# Altium PCB Digital Clock.PcbDoc (part 3 of 3)
Units mm, origin at the board's own origin, x right, y up, seen from the top; angles counter-clockwise.
Board outline 75 x 75 mm, 4 copper layers (Top Layer, GROUND, POWER, Bottom Layer), stack 1.369 mm thick; 74 components, 63 nets, 278 pads, 114 vias.
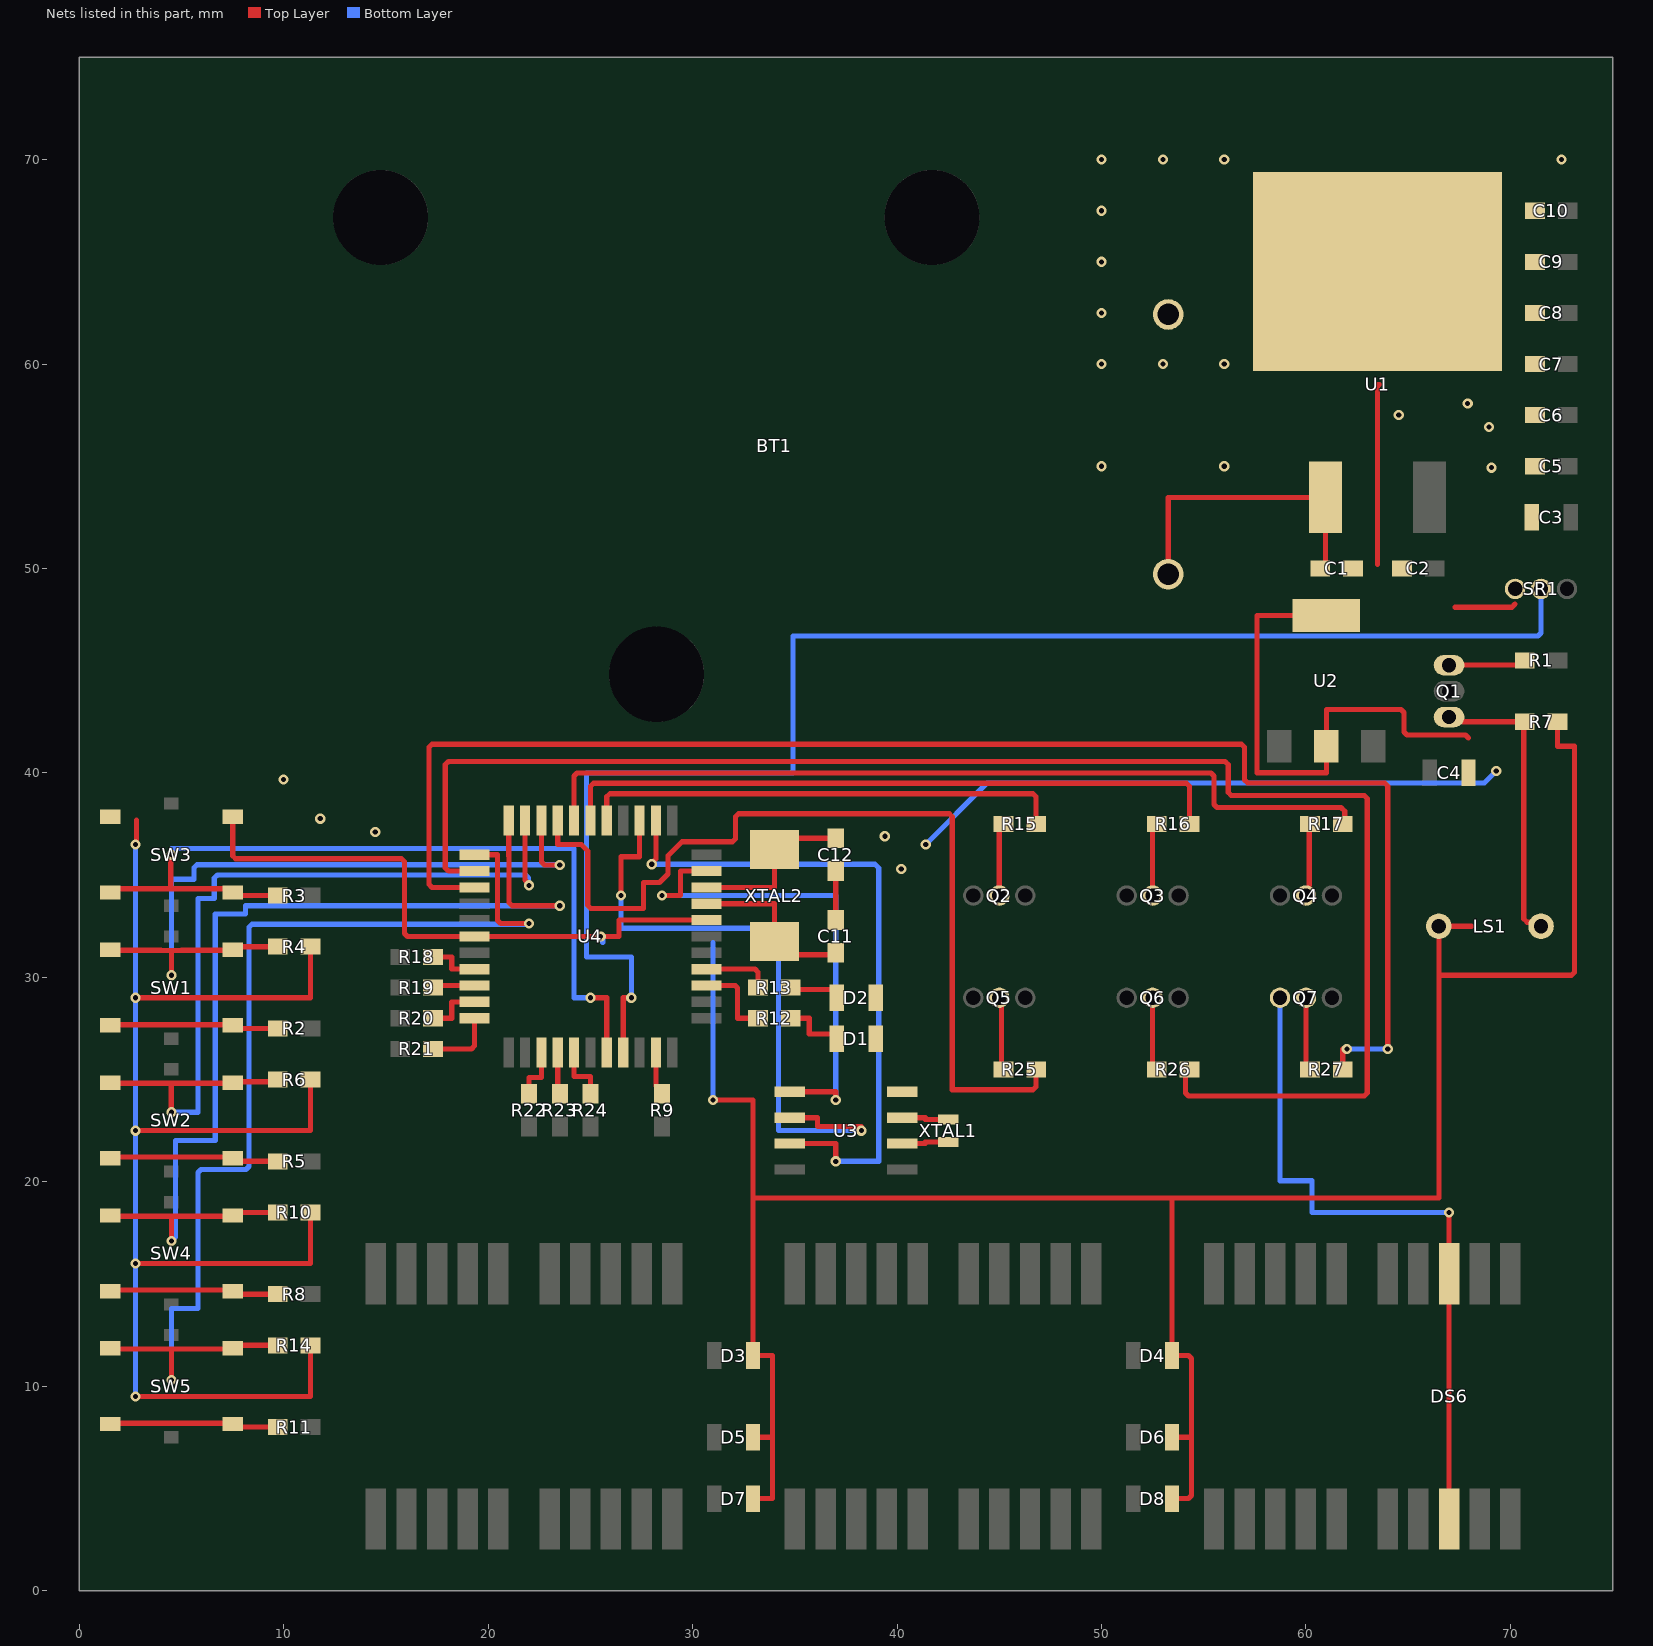
[diagram p4: the nets of this part, all layers, seen from the top]

## Via types
v1: diameter 0.5, hole 0.25, Top Layer to Bottom Layer, 110 vias
v2: diameter 1.5, hole 1, Top Layer to Bottom Layer, 4 vias

## Nets (pads, with @x,y where several pads share a name; then routed paths per layer and width w, separated by ;. In a path a pad name is that pad's centre, name@x,y a point inside that pad or via, vN(x,y) a via of type N, cw(c..) or ccw(c..) an arc to the next point about the centre after c; other vN are vias at no path point) (continued)
D5: DS6.VCC Q7.1 | length 33.8
  Top Layer w0.254: DS6.VCC@67,3.5 DS6.VCC@67,15.5 v1(67,18.5)
  Bottom Layer w0.254: Q7.1@58.73,29 58.73,20.049 60.3,20.049 60.3,18.5 v1(67,18.5)
DOWN: R14.1 SW5.1 U4.1 | length 55.3
  Top Layer w0.254: SW5.1@1.5,11.85 1.531,11.819 4.5,11.819 ; v1(4.5,10.3) 4.5,11.819 ; R14.1@9.7,12 7.65,12 SW5.1@7.5,11.85 7.47,11.82 5.009,11.82 5.008,11.819 4.5,11.819 ; U4.1@19.33,36 20.446,36 20.446,32.78 20.595,32.631 v1(22,32.631)
  Bottom Layer w0.254: v1(4.5,10.3) 4.5,13.8 5.8,13.8 5.8,20.451 5.949,20.6 8.151,20.6 8.3,20.749 8.3,32.451 8.449,32.6 21.969,32.6 v1(22,32.631)
GND: BT1.2 C1.1 C2.1 C3.1 C4.1 C5.1 C6.1 C7.1 C8.1 C9.1 C10.1 C11.1 C12.1 D1.2 D2.2 D3.2 D4.2 D5.2 D6.2 D7.2 D8.2 LS1.1 R4.2 R6.2 R7.1 R10.2 R14.2 SR1.3 SW3.1 U1.2 U2.2 U3.4 U4.6 U4.29 | length 289.8
  Top Layer w0.254: SW3.1@1.5,37.85 SW3.1@1.65,37.7 ; v1(2.75,9.5) 11.3,9.5 R14.2@11.3,12 ; v1(2.75,16) 11.3,16 R10.2@11.3,18.5 ; v1(2.75,22.5) 11.3,22.5 R6.2@11.3,25 ; v1(2.75,29) 11.3,29 R4.2@11.3,31.5 ; v1(2.75,36.5) 2.8,36.5 2.8,37.7 ; SW3.1@7.35,37.7 SW3.1@7.5,37.85 7.5,35.949 7.649,35.8 15.751,35.8 15.9,35.651 15.9,32.149 16.049,32 U4.6@19.33,32 v1(25.5,32) 26.4,32 26.4,32.8 U4.29@30.67,32.8 ; v1(31,24) 32.95,24 32.95,19.2 ; D7.2@32.95,4.5 33.9,4.5 33.9,7.5 ; D5.2@32.95,7.5 33.9,7.5 ; C11.1@37,32.8 C12.1@37,35.2 ; D8.2@53.45,4.5 54.251,4.5 54.4,4.649 54.4,7.5 ; D6.2@53.45,7.5 54.4,7.5 ; U2.2@61,47.7 57.6,47.7 57.6,40.008 61,40.008 U2.2@61,41.3 61,43.1 64.651,43.1 64.8,42.951 64.8,41.998 64.949,41.849 67.801,41.849 67.95,41.7 ; 63.5,50.2 63.5,59 63.6,59 ; 67.287,48.1 70.075,48.1 70.23,48.255 ; 68.1,32.5 LS1.1@66.5,32.5 66.5,30.1 ; R7.1@72.3,42.5 72.3,41.725 72.3,41.3 73.132,41.3 73.132,30.249 72.984,30.1 66.5,30.1 ; 32.95,19.2 53.45,19.2 ; 32.95,19.2 D3.2@32.95,11.5 33.9,11.5 33.9,7.5 ; 53.45,19.2 66.5,19.2 66.5,30.1 ; 53.45,19.2 D4.2@53.45,11.5 54.251,11.5 54.4,11.351 54.4,7.5
  Bottom Layer w0.254: v1(2.75,9.5) v1(2.75,16) v1(2.75,22.5) v1(2.75,29) v1(2.75,36.5) ; v1(25.5,32) 25.6,32 25.6,31.7 ; v1(31,24) 31,31.7 ; v1(41.4,36.5) 44.4,39.5 68.719,39.5 v1(69.31,40.091)
  other v1: 40.2,35.3 39.4,36.9 14.47,37.11 11.78,37.76 9.99,39.67 69.07,54.93 50,55 56,55 68.959,56.914 64.54,57.5 67.91,58.07 50,60 53,60 56,60 50,62.5 50,65 50,67.5 50,70 53,70 56,70 72.5,70
IO: U3.6 U4.36 | length 32
  Top Layer w0.254: v1(26.5,34) 26.5,35.9 27.4,35.9 U4.36@27.4,37.67 ; U3.6@34.75,23.135 36.1,23.135 36.1,22.7 38.25,22.7 v1(38.25,22.5)
  Bottom Layer w0.254: v1(26.5,34) 26.5,32.4 34.2,32.4 34.2,22.5 v1(38.25,22.5)
MODE: R6.1 SW2.1 U4.43 | length 42.4
  Top Layer w0.254: SW2.1@1.5,24.85 1.531,24.819 4.495,24.819 ; v1(4.5,23.4) 4.495,23.405 4.495,24.819 ; R6.1@9.7,25 9.59,24.89 7.54,24.89 7.47,24.82 5.009,24.82 5.008,24.819 4.495,24.819 ; U4.43@21.8,37.547 21.8,34.767 22,34.567 v1(22,34.5) ; U4.43@21.8,37.67 U4.43@21.923,37.547
  Bottom Layer w0.254: v1(4.5,23.4) 5.8,23.4 5.8,33.85 6.6,33.85 6.6,34.851 6.749,35 21.818,35 21.967,34.851 21.967,34.533 v1(22,34.5)
NetBT1_1: BT1.1 C1.2 U1.1 | length 15
  Top Layer w0.254: BT1.1@53.26,49.725 53.26,53.475 60.5,53.475 60.87,53.475 U1.1@60.96,53.475 60.96,50.26 C1.2@60.7,50
NetC11_2: C11.2 U4.30 XTAL2.2 | length 8.5
  Top Layer w0.254: U4.30@30.67,33.6 34,33.6 XTAL2.2@34,31.75 34.65,31.1 36.9,31.1 C11.2@37,31.2
NetC12_2: C12.2 U4.31 XTAL2.1 | length 8.4
  Top Layer w0.254: U4.31@30.67,34.4 34,34.4 XTAL2.1@34,36.25 34.55,36.8 C12.2@37,36.8
NetD1_1: D1.1 R12.2 | length 3.1
  Top Layer w0.254: R12.2@34.8,28 35.7,28 35.7,27.226 36.827,27.226 37.05,27.002 D1.1@37.05,27
NetD2_1: D2.1 R13.2 | length 2.6
  Top Layer w0.254: R13.2@34.8,29.5 34.9,29.4 36.827,29.4 37.05,29.177 D2.1@37.05,29
NetLS1_2: LS1.2 Q1.3 R7.2 | length 14.5
  Top Layer w0.254: Q1.3@67,42.73 67.452,42.73 67.682,42.5 R7.2@70.7,42.5 70.651,42.451 70.651,32.864 70.824,32.691 71.309,32.691 LS1.2@71.5,32.5
NetQ1_1: Q1.1 R1.1 | length 3.8
  Top Layer w0.254: Q1.1@67,45.27 67.01,45.28 70.48,45.28 R1.1@70.7,45.5
NetQ2_2: Q2.2 R15.2 | length 3.6
  Top Layer w0.203: R15.2@45,37.3 R15.2@45.2,37.5
  Top Layer w0.254: Q2.2@45,34 R15.2@45,37.3
NetQ3_2: Q3.2 R16.2 | length 3.6
  Top Layer w0.203: R16.2@52.5,37.3 R16.2@52.7,37.5
  Top Layer w0.254: Q3.2@52.5,34 R16.2@52.5,37.3
NetQ4_2: Q4.2 R17.2 | length 3.6
  Top Layer w0.254: Q4.2@60,34 60.143,34.143 60.143,34.505 60.16,34.522 60.16,37.46 R17.2@60.2,37.5
NetQ5_2: Q5.2 R25.2 | length 3.6
  Top Layer w0.203: Q5.2@45,29 Q5.2@45.1,28.9 ; R25.2@45.1,25.6 R25.2@45.2,25.5
  Top Layer w0.254: R25.2@45.1,25.6 Q5.2@45.1,28.9
NetQ6_2: Q6.2 R26.2 | length 3.6
  Top Layer w0.203: R26.2@52.5,25.7 R26.2@52.7,25.5
  Top Layer w0.254: R26.2@52.5,25.7 Q6.2@52.5,29
NetQ7_2: Q7.2 R27.2 | length 3.6
  Top Layer w0.203: R27.2@60,25.7 R27.2@60.2,25.5
  Top Layer w0.254: R27.2@60,25.7 Q7.2@60,29
NetR2_1: R2.1 SW1.2 | length 8.3
  Top Layer w0.254: SW1.2@1.5,27.65 1.531,27.681 7.469,27.681 7.65,27.5 R2.1@9.7,27.5
NetR3_1: R3.1 SW3.2 U4.18 | length 41.7
  Top Layer w0.254: SW3.2@1.5,34.15 1.68,34.33 4.47,34.33 ; v1(4.5,36) 4.47,35.97 4.47,34.33 ; SW3.2@7.449,34.201 7.65,34 R3.1@9.7,34 ; SW3.2@7.5,34.15 7.32,34.33 4.47,34.33 ; v1(25,29) 25.8,29 U4.18@25.8,26.33
  Bottom Layer w0.254: v1(4.5,36) 4.5,36.3 24.2,36.3 24.2,29 v1(25,29)
NetR5_1: R5.1 SW2.2 | length 8.4
  Top Layer w0.254: SW2.2@1.5,21.15 1.56,21.21 7.44,21.21 SW2.2@7.5,21.15 ; SW2.2@7.469,21.181 7.65,21 R5.1@9.7,21
NetR8_1: R8.1 SW4.2 | length 8.4
  Top Layer w0.254: SW4.2@1.5,14.65 1.56,14.71 7.44,14.71 SW4.2@7.5,14.65 ; SW4.2@7.469,14.681 7.65,14.5 R8.1@9.7,14.5
NetR9_1: R9.1 U4.21 | length 2.2
  Top Layer w0.254: U4.21@28.2,26.33 28.2,24.689 28.5,24.389 R9.1@28.5,24.3
NetR11_1: R11.1 SW5.2 | length 8.4
  Top Layer w0.203: SW5.2@7.45,8.2 SW5.2@7.65,8
  Top Layer w0.254: SW5.2@1.5,8.15 1.54,8.19 7.46,8.19 SW5.2@7.5,8.15 ; SW5.2@7.65,8 R11.1@9.7,8
NetR12_1: R12.1 U4.25 | length 4.1
  Top Layer w0.254: U4.25@30.67,29.6 32.081,29.6 32.2,29.481 32.2,28 R12.1@33.2,28
NetR13_1: R13.1 U4.26 | length 3.3
  Top Layer w0.254: U4.26@30.67,30.4 33.051,30.4 33.2,30.251 R13.1@33.2,29.5
NetSR1_2: SR1.2 U4.19 | length 71.9
  Top Layer w0.254: U4.19@26.6,26.33 26.6,29 v1(27,29)
  Bottom Layer w0.254: v1(27,29) 27,31 24.8,31 24.8,40 34.9,40 34.9,46.7 71.351,46.7 71.5,46.849 SR1.2@71.5,49
NetU3_2: U3.2 XTAL1.1 | length 2.3
  Top Layer w0.254: U3.2@40.25,21.865 41.381,21.865 41.381,21.95 XTAL1.1@42.5,21.95
NetU3_3: U3.3 XTAL1.2 | length 2.3
  Top Layer w0.254: U3.3@40.25,23.135 41.381,23.135 41.381,23.05 XTAL1.2@42.5,23.05
RB0: R18.1 U4.8 | length 2.6
  Top Layer w0.254: R18.1@17.3,31 18.214,31 18.214,30.4 U4.8@19.33,30.4
RB1: R19.1 U4.9 | length 2.1
  Top Layer w0.254: R19.1@17.3,29.5 17.4,29.6 U4.9@19.33,29.6
RB2: R20.1 U4.10 | length 2.8
  Top Layer w0.254: R20.1@17.3,28 18.214,28 18.214,28.8 U4.10@19.33,28.8
RB3: R21.1 U4.11 | length 3.4
  Top Layer w0.254: R21.1@17.3,26.5 19.181,26.5 19.33,26.649 U4.11@19.33,28
RB4: R22.1 U4.14 | length 2.6
  Top Layer w0.254: R22.1@22,24.3 22,25.1 22.6,25.1 U4.14@22.6,26.33
RB5: R23.1 U4.15 | length 2.1
  Top Layer w0.254: U4.15@23.4,26.33 23.4,24.4 R23.1@23.5,24.3
RB6: R24.1 U4.16 | length 2.8
  Top Layer w0.254: U4.16@24.2,26.33 24.2,25.145 25,25.145 R24.1@25,24.3
RD0: R15.1 U4.38 | length 23.6
  Top Layer w0.254: U4.38@25.8,37.67 25.8,38.835 25.949,38.984 46.651,38.984 46.8,38.835 R15.1@46.8,37.5
RD1: R16.1 U4.39 | length 32.9
  Top Layer w0.254: U4.39@25,37.67 25,39.343 25.149,39.492 54.151,39.492 54.3,39.343 R16.1@54.3,37.5
RD2: R17.1 U4.40 | length 42.2
  Top Layer w0.254: U4.40@24.2,37.67 24.2,39.851 24.349,40 55.351,40 55.5,39.851 55.5,38.449 55.649,38.3 61.72,38.3 61.894,38.126 61.894,37.594 R17.1@61.8,37.5
RD3: R25.1 U4.41 | length 45.6
  Top Layer w0.254: U4.41@23.4,37.67 23.4,36.5 24.551,36.5 24.869,36.182 24.869,33.518 25.018,33.369 27.6,33.369 27.6,34.631 28.382,34.631 28.8,35.049 28.8,35.946 29.485,36.631 31.951,36.631 32.1,36.78 32.1,37.851 32.249,38 42.551,38 42.7,37.851 42.7,24.5 46.651,24.5 46.8,24.649 R25.1@46.8,25.5
RD4: R26.1 U4.2 | length 77.9
  Top Layer w0.254: U4.2@19.33,35.2 18.049,35.2 17.9,35.349 17.9,40.403 18.049,40.552 56.043,40.552 56.2,40.395 56.2,39.049 56.349,38.9 62.851,38.9 63,38.751 63,24.349 62.851,24.2 54.249,24.2 54.1,24.349 54.1,25.3 R26.1@54.3,25.5
RD5: R27.1 U4.3 | length 73.8
  Top Layer w0.254: U4.3@19.33,34.4 17.249,34.4 17.1,34.549 17.1,41.251 17.249,41.4 56.851,41.4 57,41.251 57,39.649 57.149,39.5 63.851,39.5 64,39.351 v1(64,26.5) ; R27.1@61.8,25.5 61.8,26.5 v1(62,26.5)
  Bottom Layer w0.254: v1(62,26.5) v1(64,26.5)
RST: U3.5 U4.32 | length 24.5
  Top Layer w0.254: v1(28.5,34) 29.4,34 29.4,35.2 U4.32@30.67,35.2 ; U3.5@34.75,24.405 37,24.405 v1(37,24)
  Bottom Layer w0.254: v1(28.5,34) 37,34 v1(37,24)
SCLK: U3.7 U4.35 | length 33
  Top Layer w0.254: v1(28,35.531) 28,35.598 28.2,35.798 U4.35@28.2,37.67 ; U3.7@34.75,21.865 37,21.865 v1(37,21)
  Bottom Layer w0.254: v1(28,35.531) 38.92,35.531 39.1,35.351 39.1,21 v1(37,21)
SET: R4.1 SW1.1 U4.42 | length 36.8
  Top Layer w0.254: SW1.1@1.5,31.35 1.53,31.32 3.991,31.32 ; v1(4.5,30.1) 4.5,31.319 ; R4.1@9.7,31.5 7.65,31.5 7.47,31.32 5.009,31.32 5.008,31.319 4.5,31.319 ; U4.42@22.6,37.67 22.6,35.649 22.749,35.5 v1(23.5,35.5) ; 3.992,31.319 4.5,31.319 ; 3.991,31.32 3.992,31.319
  Bottom Layer w0.254: v1(4.5,30.1) 4.5,34.8 5.6,34.8 5.6,35.359 5.749,35.508 23.492,35.508 v1(23.5,35.5)
UP: R10.1 SW4.1 U4.44 | length 51.4
  Top Layer w0.254: SW4.1@1.5,18.35 1.54,18.31 7.46,18.31 SW4.1@7.5,18.35 ; v1(4.5,17.1) 4.5,18.319 ; SW4.1@7.469,18.319 7.65,18.5 R10.1@9.7,18.5 ; U4.44@21,37.67 21,35.951 21.008,35.943 21.008,33.649 21.157,33.5 v1(23.5,33.5)
  Bottom Layer w0.254: v1(4.5,17.1) 4.7,17.3 4.7,22.02 6.65,22.02 6.65,33.1 8.13,33.1 8.13,33.5 v1(23.5,33.5)
pads on no net: BT1. DS1.DP DS2.DP DS3.DP DS4.DP DS5.DP DS6.DP SW1.G SW2.G SW3.G SW4.G SW5.G U4.4 U4.5 U4.12 U4.13 U4.17 U4.22 U4.23 U4.24 U4.27 U4.33 U4.34
copper on no net: | length 347.8
  Top Layer w0.018: 5.487,4.096 7.846,4.096 ; 5.487,4.114 7.846,4.114 ; 5.487,4.132 7.828,4.132 ; 5.487,4.15 7.828,4.15 ; 5.487,4.168 7.828,4.168 ; 5.487,4.186 7.81,4.186 ; 5.487,4.204 7.81,4.204 ; 5.487,4.223 7.792,4.223 ; 5.487,4.241 7.792,4.241 ; 5.487,4.259 7.792,4.259 ; 5.487,4.277 7.774,4.277 ; 5.487,4.295 7.774,4.295 ; 5.487,4.313 7.756,4.313 ; 5.487,4.331 7.756,4.331 ; 5.487,4.35 7.756,4.35 ; 5.487,4.368 7.737,4.368 ; 5.487,4.386 7.737,4.386 ; 5.487,4.404 7.719,4.404 ; 5.487,4.422 7.719,4.422 ; 5.487,4.44 7.701,4.44 ; 5.487,4.459 7.701,4.459 ; 5.505,3.86 7.901,3.86 ; 5.505,3.878 7.901,3.878 ; 5.505,3.896 7.901,3.896 ; 5.505,3.914 7.901,3.914 ; 5.505,3.932 7.901,3.932 ; 5.505,3.95 7.883,3.95 ; 5.505,3.969 7.883,3.969 ; 5.505,3.987 7.883,3.987 ; 5.505,4.005 7.883,4.005 ; 5.505,4.023 7.864,4.023 ; 5.505,4.041 7.864,4.041 ; 5.505,4.059 7.864,4.059 ; 5.505,4.077 7.846,4.077 ; 5.505,4.477 7.683,4.477 ; 5.505,4.495 7.683,4.495 ; 5.505,4.513 7.665,4.513 ; 5.505,4.531 7.665,4.531 ; 5.505,4.549 7.647,4.549 ; 5.505,4.567 7.647,4.567 ; 5.523,3.733 7.937,3.733 ; 5.523,3.751 7.937,3.751 ; 5.523,3.769 7.937,3.769 ; 5.523,3.787 7.919,3.787 ; 5.523,3.805 7.919,3.805 ; 5.523,3.823 7.919,3.823 ; 5.523,3.841 7.919,3.841 ; 5.523,4.586 7.629,4.586 ; 5.523,4.604 7.61,4.604 ; 5.523,4.622 7.61,4.622 ; 5.523,4.64 7.592,4.64 ; 5.523,5.221 5.723,5.221 ; 5.523,5.239 5.723,5.239 ; 5.523,5.257 5.723,5.257 ; 5.523,5.275 5.705,5.275 ; 5.523,5.293 5.705,5.293 ; 5.523,5.311 5.705,5.311 ; 5.523,5.33 5.705,5.33 ; 5.523,5.348 5.705,5.348 ; 5.523,5.366 5.705,5.366 ; 5.523,5.384 5.705,5.384 ; 5.542,3.66 7.955,3.66 ; 5.542,3.678 7.955,3.678 ; 5.542,3.696 7.937,3.696 ; 5.542,3.714 7.937,3.714 ; 5.542,4.658 7.592,4.658 ; 5.542,4.676 7.574,4.676 ; 5.542,4.694 7.556,4.694 ; 5.542,4.713 7.556,4.713 ; 5.542,5.094 5.777,5.094 ; 5.542,5.112 5.777,5.112 ; 5.542,5.13 5.759,5.13 ; 5.542,5.148 5.759,5.148 ; 5.542,5.166 5.741,5.166 ; 5.542,5.184 5.741,5.184 ; 5.542,5.203 5.723,5.203 ; 5.542,5.402 5.705,5.402 ; 5.542,5.42 5.705,5.42 ; 5.542,5.439 5.705,5.439 ; 5.542,5.457 5.705,5.457 ; 5.542,5.475 5.705,5.475 ; 5.542,5.493 5.723,5.493 ; 5.542,5.511 5.723,5.511 ; 5.56,3.624 7.955,3.624 ; 5.56,3.642 7.955,3.642 ; 5.56,4.731 7.538,4.731 ; 5.56,4.749 7.52,4.749 ; 5.56,4.767 6.376,4.767 ; 5.56,5.021 5.832,5.021 ; 5.56,5.039 5.814,5.039 ; 5.56,5.057 5.814,5.057 ; 5.56,5.076 5.796,5.076 ; 5.56,5.529 5.723,5.529 ; 5.56,5.547 5.723,5.547 ; 5.56,5.566 5.723,5.566 ; 5.56,5.584 5.723,5.584 ; 5.578,3.569 7.955,3.569 ; 5.578,3.587 7.955,3.587 ; 5.578,3.606 7.955,3.606 ; 5.578,4.785 6.286,4.785 ; 5.578,4.803 6.213,4.803 ; 5.578,4.821 6.159,4.821 ; 5.578,4.967 5.886,4.967 ; 5.578,4.985 5.868,4.985 ; 5.578,5.003 5.85,5.003 ; 5.578,5.602 5.741,5.602 ; 5.578,5.62 5.741,5.62 ; 5.578,5.638 5.741,5.638 ; 5.596,3.533 7.955,3.533 ; 5.596,3.551 7.955,3.551 ; 5.596,4.84 6.104,4.84 ; 5.596,4.858 6.068,4.858 ; 5.596,4.876 6.032,4.876 ; 5.596,4.93 5.941,4.93 ; 5.596,4.949 5.904,4.949 ; 5.596,5.656 5.741,5.656 ; 5.596,5.674 5.759,5.674 ; 5.614,3.515 7.955,3.515 ; 5.614,4.894 5.995,4.894 ; 5.614,4.912 5.959,4.912 ; 5.614,5.693 5.759,5.693 ; 5.614,5.711 5.777,5.711 ; 5.614,5.729 5.777,5.729 ; 5.632,3.479 7.955,3.479 ; 5.632,3.497 7.955,3.497 ; 5.632,5.747 5.796,5.747 ; 5.632,5.765 5.796,5.765 ; 5.65,3.46 7.955,3.46 ; 5.65,5.783 5.814,5.783 ; 5.65,5.801 5.832,5.801 ; 5.669,3.442 7.955,3.442 ; 5.669,5.82 5.85,5.82 ; 5.687,3.406 7.955,3.406 ; 5.687,3.424 7.955,3.424 ; 5.687,5.838 5.85,5.838 ; 5.687,5.856 5.868,5.856 ; 5.687,6.364 5.85,6.364 ; 5.687,6.382 5.814,6.382 ; 5.687,6.4 5.777,6.4 ; 5.705,3.388 7.955,3.388 ; 5.705,5.874 5.886,5.874 ; 5.705,6.291 6.032,6.291 ; 5.705,6.31 5.977,6.31 ; 5.705,6.328 5.923,6.328 ; 5.705,6.346 5.886,6.346 ; 5.723,3.37 7.955,3.37 ; 5.723,5.892 5.923,5.892 ; 5.723,5.91 5.941,5.91 ; 5.723,6.255 6.159,6.255 ; 5.723,6.273 6.086,6.273 ; 5.741,3.351 7.955,3.351 ; 5.741,5.928 5.959,5.928 ; 5.741,6.237 6.249,6.237 ; 5.759,3.333 7.955,3.333 ; 5.759,5.947 5.995,5.947 ; 5.759,6.219 7.247,6.219 ; 5.777,3.315 7.955,3.315 ; 5.777,5.965 7.229,5.965 ; 5.777,6.201 7.229,6.201 ; 5.796,3.297 7.955,3.297 ; 5.796,5.983 7.211,5.983 ; 5.796,6.183 7.211,6.183 ; 5.814,3.279 7.955,3.279 ; 5.814,6.001 7.193,6.001 ; 5.814,6.164 7.193,6.164 ; 5.832,6.019 7.193,6.019 ; 5.832,6.146 7.175,6.146 ; 5.85,3.261 7.955,3.261 ; 5.85,6.037 7.157,6.037 ; 5.85,6.128 7.157,6.128 ; 5.868,3.243 7.955,3.243 ; 5.868,6.056 7.139,6.056 ; 5.868,6.11 7.12,6.11 ; 5.886,3.224 7.955,3.224 ; 5.886,6.074 7.12,6.074 ; 5.904,3.206 7.955,3.206 ; 5.904,6.092 7.102,6.092 ; 5.923,5.457 6.304,5.457 ; 5.923,5.475 6.304,5.475 ; 5.923,5.493 6.304,5.493 ; 5.941,3.188 7.937,3.188 ; 5.941,5.402 6.286,5.402 ; 5.941,5.42 6.304,5.42 ; 5.941,5.439 6.304,5.439 ; 5.941,5.511 6.304,5.511 ; 5.941,5.529 6.304,5.529 ; 5.941,5.547 6.286,5.547 ; 5.959,3.17 7.937,3.17 ; 5.959,5.366 6.267,5.366 ; 5.959,5.384 6.286,5.384 ; 5.959,5.566 6.286,5.566 ; 5.959,5.584 6.267,5.584 ; 5.977,5.348 6.249,5.348 ; 5.977,5.602 6.249,5.602 ; 5.995,3.152 7.937,3.152 ; 5.995,5.33 6.231,5.33 ; 5.995,5.62 6.231,5.62 ; 6.013,3.134 7.937,3.134 ; 6.032,5.311 6.213,5.311 ; 6.032,5.638 6.213,5.638 ; 6.05,3.116 7.937,3.116 ; 6.068,2.444 6.086,2.444 ; 6.068,2.462 6.104,2.462 ; 6.068,2.48 6.104,2.48 ; 6.068,2.499 6.104,2.499 ; 6.068,2.517 6.122,2.517 ; 6.068,2.535 6.122,2.535 ; 6.068,2.553 6.14,2.553 ; 6.068,2.571 6.159,2.571 ; 6.068,2.589 6.159,2.589 ; 6.068,3.097 7.937,3.097 ; 6.068,5.293 6.159,5.293 ; 6.068,5.656 6.159,5.656 ; 6.086,2.607 6.177,2.607 ; 6.086,2.626 6.213,2.626 ; 6.086,2.644 6.249,2.644 ; 6.104,2.662 6.721,2.662 ; 6.104,2.68 6.685,2.68 ; 6.104,3.079 7.937,3.079 ; 6.122,2.698 6.667,2.698 ; 6.14,2.716 6.649,2.716 ; 6.14,3.061 7.937,3.061 ; 6.159,3.043 7.919,3.043 ; 6.177,2.734 6.649,2.734 ; 6.177,5.947 6.812,5.947 ; 6.195,3.025 7.919,3.025 ; 6.213,2.753 6.394,2.753 ; 6.231,3.007 7.919,3.007 ; 6.231,5.928 6.776,5.928 ; 6.249,5.91 6.739,5.91 ; 6.267,2.989 7.919,2.989 ; 6.286,2.444 6.34,2.444 ; 6.286,2.462 6.34,2.462 ; 6.286,2.48 6.358,2.48 ; 6.286,2.499 6.376,2.499 ; 6.286,2.517 6.376,2.517 ; 6.286,2.535 6.413,2.535 ; 6.286,2.553 6.431,2.553 ; 6.286,2.97 7.919,2.97 ; 6.286,5.892 6.721,5.892 ; 6.286,6.237 6.739,6.237 ; 6.304,2.408 6.322,2.408 ; 6.304,2.426 6.322,2.426 ; 6.304,2.571 7.048,2.571 ; 6.304,2.589 7.03,2.589 ; 6.304,2.607 6.993,2.607 ; 6.304,2.626 6.993,2.626 ; 6.304,5.874 6.685,5.874 ; 6.322,2.644 6.993,2.644 ; 6.322,2.952 7.919,2.952 ; 6.34,5.856 6.667,5.856 ; 6.358,2.934 7.919,2.934 ; 6.358,5.838 6.649,5.838 ; 6.358,6.255 6.649,6.255 ; 6.376,5.82 6.63,5.82 ; 6.394,2.916 7.919,2.916 ; 6.394,5.801 6.612,5.801 ; 6.413,5.783 6.594,5.783 ; 6.431,2.898 7.901,2.898 ; 6.431,5.003 6.558,5.003 ; 6.431,5.021 6.558,5.021 ; 6.431,5.039 6.576,5.039 ; 6.431,5.057 6.576,5.057 ; 6.431,5.076 6.576,5.076 ; 6.431,5.094 6.576,5.094 ; 6.431,5.112 6.576,5.112 ; 6.431,5.13 6.576,5.13 ; 6.431,5.148 6.576,5.148 ; 6.431,5.166 6.558,5.166 ; 6.431,5.747 6.558,5.747 ; 6.431,5.765 6.576,5.765 ; 6.449,2.753 6.649,2.753 ; 6.449,4.949 6.54,4.949 ; 6.449,4.967 6.558,4.967 ; 6.449,4.985 6.558,4.985 ; 6.449,5.184 6.558,5.184 ; 6.449,5.203 6.54,5.203 ; 6.449,5.729 6.54,5.729 ; 6.467,2.771 6.649,2.771 ; 6.467,2.88 7.901,2.88 ; 6.467,4.894 6.521,4.894 ; 6.467,4.912 6.54,4.912 ; 6.467,4.93 6.54,4.93 ; 6.467,5.221 6.521,5.221 ; 6.467,5.711 6.521,5.711 ; 6.485,2.789 6.649,2.789 ; 6.485,2.807 7.883,2.807 ; 6.485,4.858 6.503,4.858 ; 6.485,4.876 6.521,4.876 ; 6.485,5.239 6.503,5.239 ; 6.485,5.693 6.521,5.693 ; 6.503,2.353 6.612,2.353 ; 6.503,2.372 6.612,2.372 ; 6.503,2.39 6.63,2.39 ; 6.503,2.408 6.649,2.408 ; 6.503,2.426 6.667,2.426 ; 6.503,2.444 6.685,2.444 ; 6.503,2.462 6.703,2.462 ; 6.503,2.48 6.721,2.48 ; 6.503,2.825 7.901,2.825 ; 6.503,2.843 7.901,2.843 ; 6.503,2.861 7.901,2.861 ; 6.521,2.317 6.594,2.317 ; 6.521,2.335 6.594,2.335 ; 6.521,2.499 6.757,2.499 ; 6.521,2.517 7.102,2.517 ; 6.521,2.535 7.084,2.535 ; 6.54,2.299 6.576,2.299 ; 6.54,2.553 7.066,2.553 ; 6.558,2.281 6.576,2.281 ; 6.63,4.767 7.52,4.767 ; 6.667,2.789 7.883,2.789 ; 6.685,5.475 7.066,5.475 ; 6.703,2.771 7.883,2.771 ; 6.703,5.402 7.048,5.402 ; 6.703,5.42 7.066,5.42 ; 6.703,5.439 7.066,5.439 ; 6.703,5.457 7.066,5.457 ; 6.703,5.493 7.066,5.493 ; 6.703,5.511 7.066,5.511 ; 6.703,5.529 7.066,5.529 ; 6.703,5.547 7.048,5.547 ; 6.721,4.785 7.501,4.785 ; 6.721,5.366 7.03,5.366 ; 6.721,5.384 7.048,5.384 ; 6.721,5.566 7.048,5.566 ; 6.721,5.584 7.03,5.584 ; 6.739,2.662 7.864,2.662 ; 6.739,2.753 7.883,2.753 ; 6.739,5.348 7.011,5.348 ; 6.739,5.602 7.011,5.602 ; 6.757,5.33 6.993,5.33 ; 6.757,5.62 6.993,5.62 ; 6.757,6.237 7.247,6.237 ; 6.794,2.68 7.864,2.68 ; 6.794,2.734 7.883,2.734 ; 6.794,4.803 7.483,4.803 ; 6.794,5.311 6.975,5.311 ; 6.794,5.638 6.975,5.638 ; 6.812,2.698 7.864,2.698 ; 6.83,2.716 7.883,2.716 ; 6.83,5.293 6.921,5.293 ; 6.83,5.656 6.939,5.656 ; 6.848,4.821 7.465,4.821 ; 6.848,6.255 7.266,6.255 ; 6.884,2.499 7.102,2.499 ; 6.903,4.84 7.465,4.84 ; 6.921,6.273 7.284,6.273 ; 6.939,2.48 7.12,2.48 ; 6.939,4.858 7.447,4.858 ; 6.957,2.462 7.12,2.462 ; 6.975,4.876 7.429,4.876 ; 6.975,6.291 7.284,6.291 ; 6.993,2.444 7.139,2.444 ; 6.993,5.947 7.247,5.947 ; 7.011,2.426 7.139,2.426 ; 7.011,2.644 7.864,2.644 ; 7.011,4.894 7.411,4.894 ; 7.03,2.408 7.139,2.408 ; 7.03,4.912 7.411,4.912 ; 7.03,5.928 7.266,5.928 ; 7.03,6.31 7.284,6.31 ; 7.048,2.39 7.139,2.39 ; 7.048,2.626 7.864,2.626 ; 7.066,2.372 7.139,2.372 ; 7.066,4.93 7.411,4.93 ; 7.066,5.91 7.284,5.91 ; 7.066,6.328 7.302,6.328 ; 7.084,2.335 7.139,2.335 ; 7.084,2.353 7.139,2.353 ; 7.084,2.607 7.846,2.607 ; 7.084,4.949 7.411,4.949 ; 7.084,5.892 7.284,5.892 ; 7.102,2.317 7.12,2.317 ; 7.102,2.589 7.846,2.589 ; 7.102,4.967 7.429,4.967 ; 7.102,5.874 7.302,5.874 ; 7.102,6.346 7.302,6.346 ; 7.12,4.985 7.429,4.985 ; 7.12,5.856 7.32,5.856 ; 7.139,2.571 7.846,2.571 ; 7.139,5.003 7.429,5.003 ; 7.139,5.838 7.32,5.838 ; 7.157,2.553 7.846,2.553 ; 7.157,5.021 7.447,5.021 ; 7.157,5.82 7.338,5.82 ; 7.157,6.364 7.302,6.364 ; 7.175,2.535 7.846,2.535 ; 7.175,5.039 7.447,5.039 ; 7.175,5.783 7.356,5.783 ; 7.175,5.801 7.356,5.801 ; 7.175,6.382 7.302,6.382 ; 7.193,5.057 7.447,5.057 ; 7.193,5.765 7.374,5.765 ; 7.211,2.517 7.828,2.517 ; 7.211,5.076 7.447,5.076 ; 7.211,5.094 7.465,5.094 ; 7.211,5.729 7.393,5.729 ; 7.211,5.747 7.374,5.747 ; 7.211,6.4 7.302,6.4 ; 7.229,2.499 7.828,2.499 ; 7.229,5.112 7.465,5.112 ; 7.229,5.13 7.465,5.13 ; 7.229,5.693 7.411,5.693 ; 7.229,5.711 7.393,5.711 ; 7.247,2.48 7.828,2.48 ; 7.247,5.148 7.465,5.148 ; 7.247,5.166 7.465,5.166 ; 7.247,5.638 7.429,5.638 ; 7.247,5.656 7.411,5.656 ; 7.247,5.674 7.411,5.674 ; 7.266,2.444 7.81,2.444 ; 7.266,2.462 7.828,2.462 ; 7.266,5.184 7.483,5.184 ; 7.266,5.203 7.483,5.203 ; 7.266,5.221 7.483,5.221 ; 7.266,5.566 7.447,5.566 ; 7.266,5.584 7.447,5.584 ; 7.266,5.602 7.429,5.602 ; 7.266,5.62 7.429,5.62 ; 7.284,2.426 7.81,2.426 ; 7.284,5.239 7.483,5.239 ; 7.284,5.257 7.483,5.257 ; 7.284,5.275 7.483,5.275 ; 7.284,5.293 7.483,5.293 ; 7.284,5.311 7.483,5.311 ; 7.284,5.33 7.483,5.33 ; 7.284,5.42 7.465,5.42 ; 7.284,5.439 7.465,5.439 ; 7.284,5.457 7.465,5.457 ; 7.284,5.475 7.465,5.475 ; 7.284,5.493 7.465,5.493 ; 7.284,5.511 7.465,5.511 ; 7.284,5.529 7.447,5.529 ; 7.284,5.547 7.447,5.547 ; 7.302,2.408 7.81,2.408 ; 7.302,5.348 7.483,5.348 ; 7.302,5.366 7.483,5.366 ; 7.302,5.384 7.483,5.384 ; 7.302,5.402 7.483,5.402 ; 7.32,2.39 7.81,2.39 ; 7.338,2.353 7.792,2.353 ; 7.338,2.372 7.81,2.372 ; 7.356,2.335 7.792,2.335 ; 7.374,2.317 7.792,2.317 ; 7.393,2.281 7.774,2.281 ; 7.393,2.299 7.792,2.299 ; 7.411,2.263 7.774,2.263 ; 7.429,2.244 7.774,2.244 ; 7.447,2.208 7.756,2.208 ; 7.447,2.226 7.774,2.226 ; 7.465,2.19 7.756,2.19 ; 7.483,2.172 7.756,2.172 ; 7.501,2.136 7.737,2.136 ; 7.501,2.154 7.756,2.154 ; 7.52,2.117 7.737,2.117 ; 7.538,2.099 7.719,2.099 ; 7.556,2.081 7.719,2.081 ; 7.574,2.063 7.701,2.063 ; 7.61,2.045 7.647,2.045
  other v2: 2,2 73,2 2,73 73,73

## Polygon pours and split planes (outlines as drawn)
GND on Top Layer "GND_L01_P008" (solid, remove dead copper, pour order 8): 48.7,71.1 48.7,40.77 1.535,40.77 1.536,7.15 13.36,7.15 13.36,1.58 65.85,1.58 70.96,1.58 70.96,19.36 66.97,19.36 66.97,27.31 71.54,27.31 73.53,27.31 74.11,27.31 74.11,71.1 73.53,71.1
5V on Top Layer "5V_L01_P007" (solid, pour order 7): 72.26,53.9 72.26,46.37 72.26,44.84 70.38,44.84 70.38,43.42 73.23,43.42 74.15,43.42 74.15,53.9
GND on Top Layer "GND_L01_P001" (solid, pour order 1): 61.8,49 58.9,49 58.9,46.5 63.3,46.5 63.3,47.9 67.6,47.9 67.6,48.9 65.2,48.9 65.2,50.8 61.8,50.8
GND on Top Layer "GND_L01_P000" (solid, pour order 0): 48.7,58.8 69.5,58.8 69.5,51.3 71.68,51.3 71.68,71.1 48.7,71.1
5V on Top Layer "5V_L01_P006" (solid, pour order 6): 72.5,53.28
5V on Top Layer "5V_L01_P004" (solid, pour order 4): 77.7,65.1
GND on Top Layer "GND_L01_P002" (solid, pour order 2): 38.1,37.6 42.1,37.6 42.1,34.3 41.2,34.3 41.2,24.1 39.4,24.1 39.4,25.9 38.2,25.9 38.2,32.3 36.2,32.3 36.2,35.7 38.1,35.7
GND on Bottom Layer "GND_L04_P009" (solid, remove dead copper, pour order 9): 73.8,50.03 49.04,50.03 48.94,49.93 49.05,49.82 49.05,40.36 1.37,40.36 1.37,7.24 70.96,7.24 70.96,19.4 67.05,19.4 67.05,27.23 73.8,27.23
GND on Bottom Layer "GND_L04_P005" (solid, pour order 5): 3.65,37.17 3.65,8.82 1.91,8.82 1.91,37.17
GND on GROUND (split plane): 74.49,0.51 71.24,0.51 71.24,20.91 11.57,20.91 11.57,0.51 0.51,0.51 0.51,74.49 74.49,74.49
5V on POWER (split plane): 74.49,0.51 71.24,0.51 71.24,20.91 11.57,20.91 11.57,0.51 0.51,0.51 0.51,74.49 74.49,74.49

## Keep-outs
Keep-Out Layer:
  lines w0.2: 238.41,195.535 cw(c227.7,104.3) 238.581,195.515 ; 0,0 0,75 75,75 75,0 0,0

## Other copper
Top Layer:
  text "HAYTA" at 3.969,1.116 h0.93
GROUND (plane layer: these items are gaps in the copper):
  rectangle: 11.57,0.24 71.24,20.91
POWER (plane layer: these items are gaps in the copper):
  rectangle: 11.57,0.24 71.24,20.91

## Silkscreen, mask and mechanical layers (free items; w line width, h text height)
Top Overlay:
  text "DIGITAL CLOCK" at 55.85,72.35 h1.25
  text "RESET" at 1.334,39 h0.5
  text "SET" at 1.334,32.5 h0.5
  text "Tarih" at 39.87,28.85 h0.5
  text "Saat" at 39.85,26.85 h0.5
  text "MODE" at 1.334,26 h0.5
  text "UP" at 1.333,19.5 h0.5
  text "DOWN" at 1.334,13 h0.5
  text "15.08.2022" at 73.15,3.85 h1.25 r90